# EAGLE board Envelope (EAGLE 9.6.2)
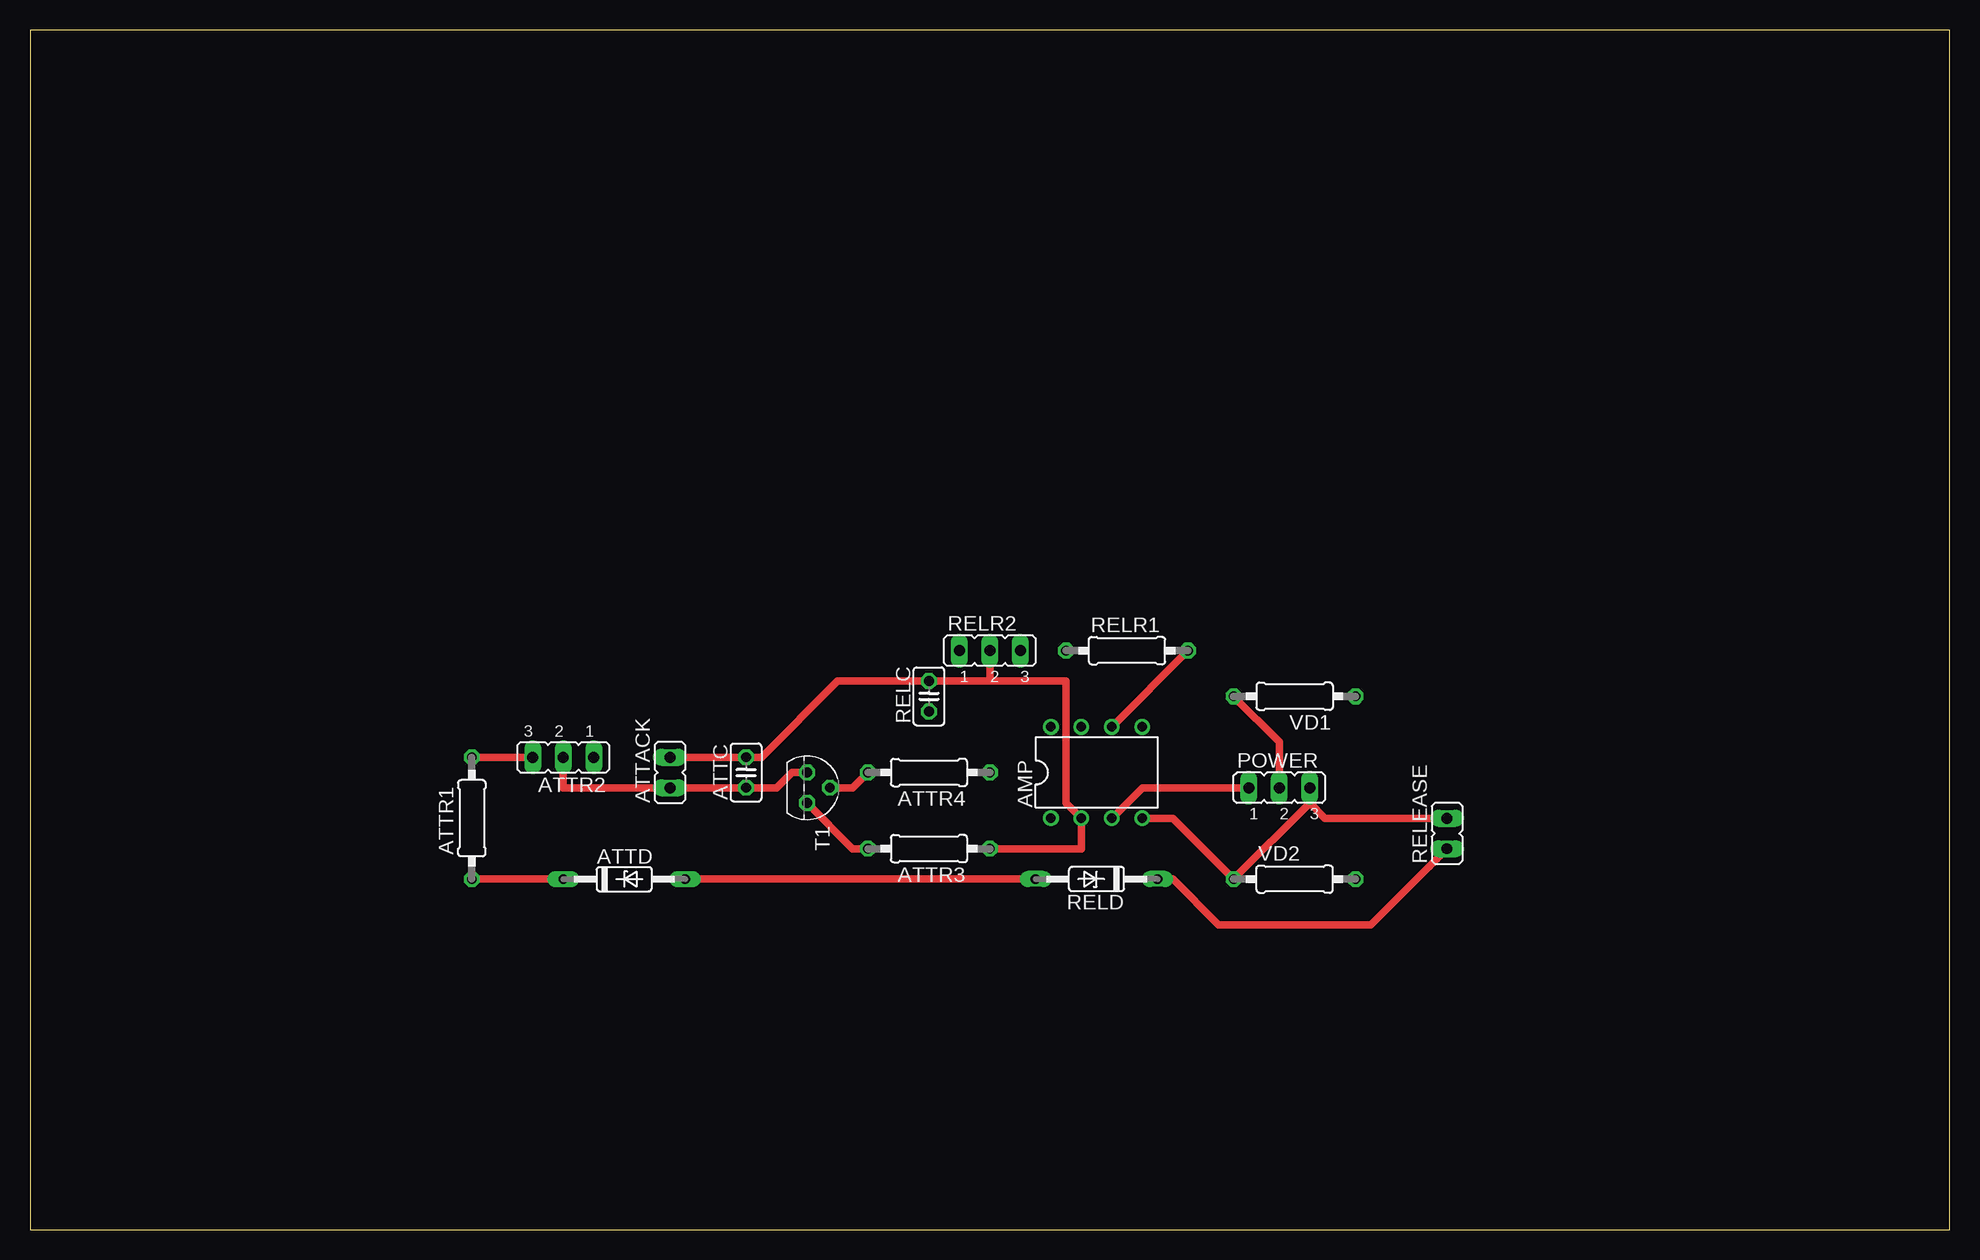
[diagram p0: board, top side]
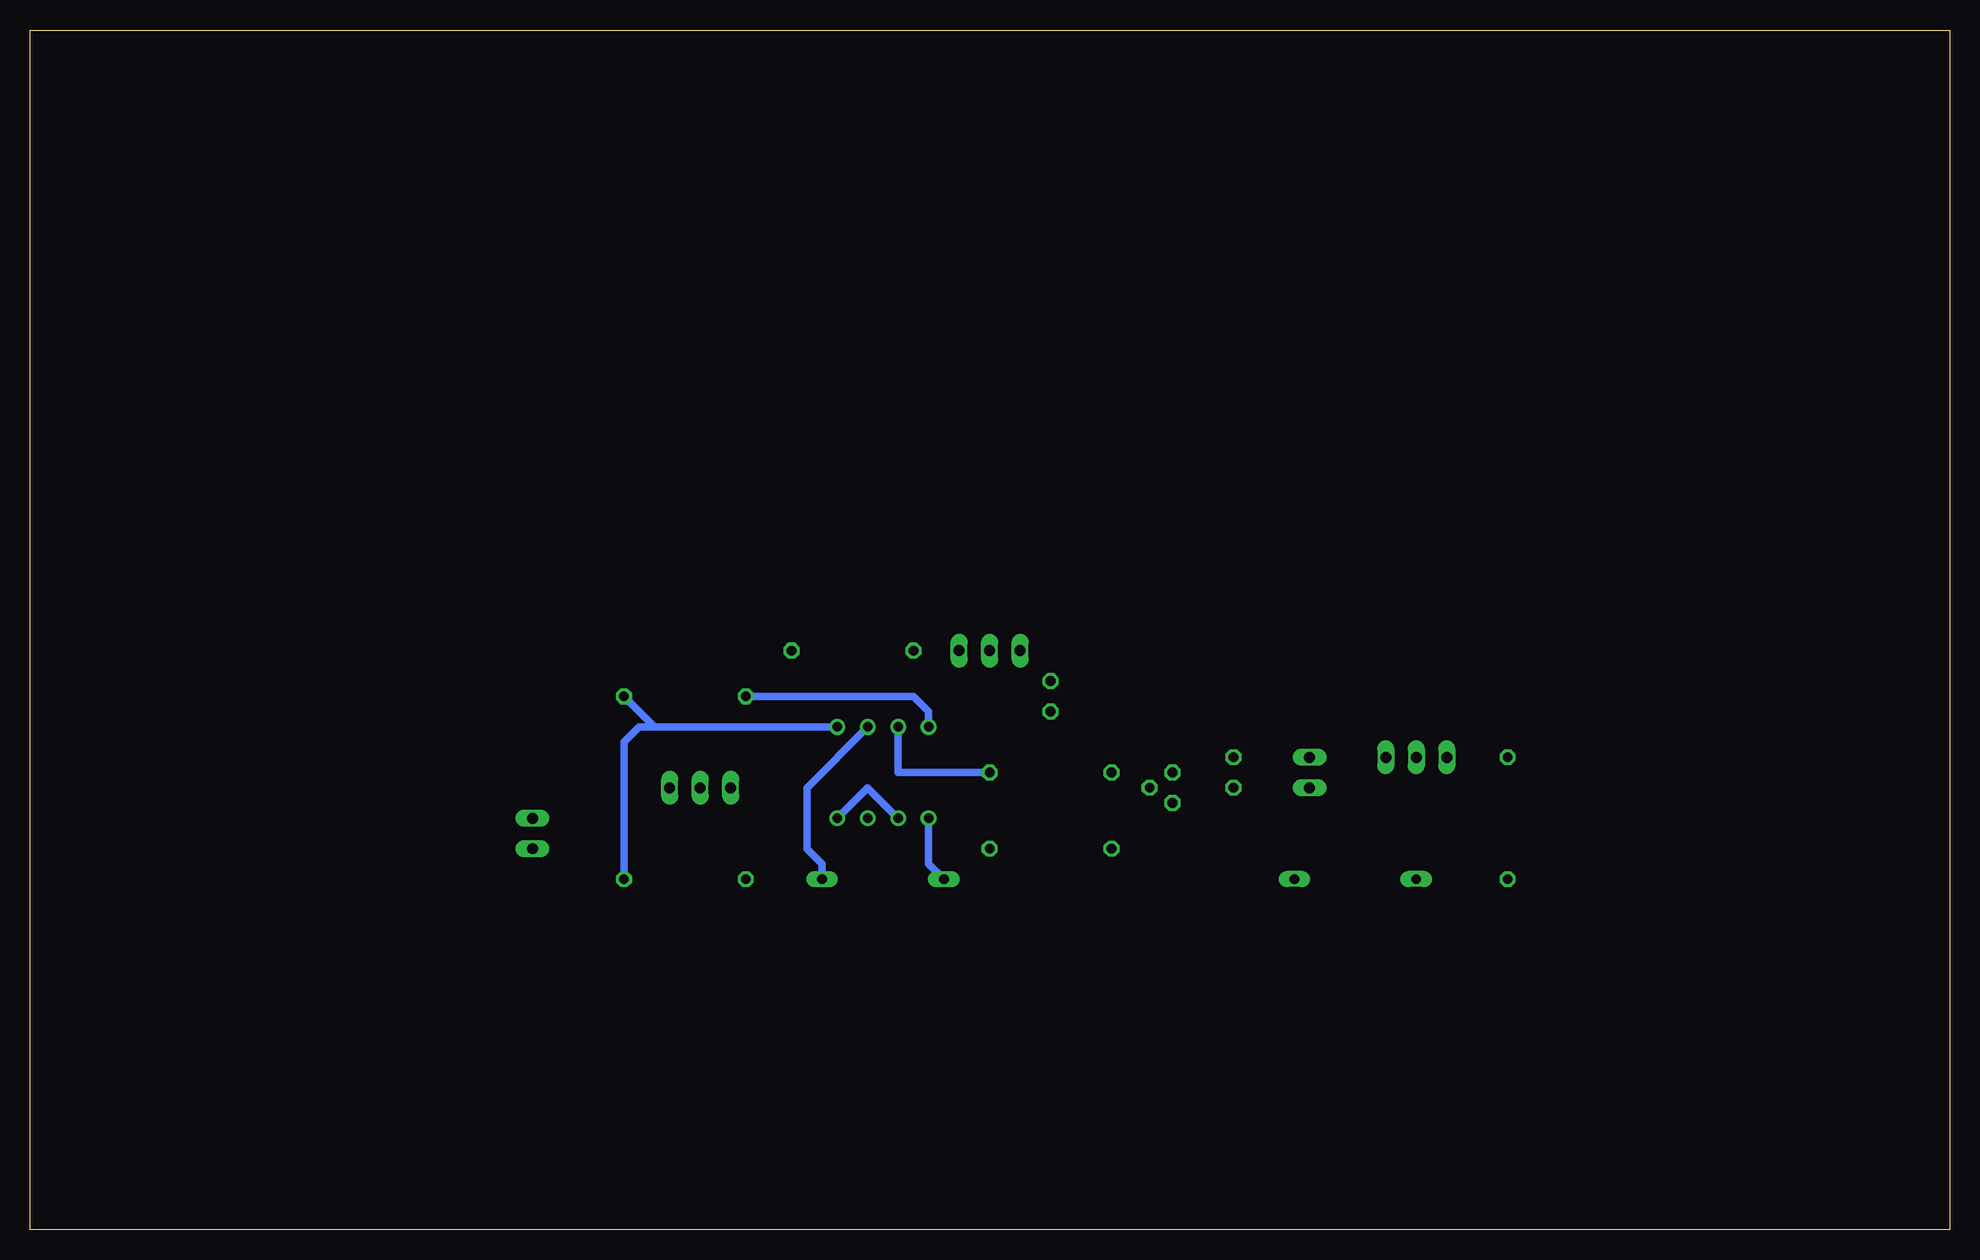
[diagram p1: board, bottom side, seen from below]

Size 160 x 100 mm. Coordinates in mm from the lower left corner, seen from the top.
Outline: 0,0 160,0 160,100 0,100 0,0
Copper layers (1*16): Top 0.035mm / dielectric 1.5mm / Bottom 0.035mm
Design rules "default": minimum track width 6mil, minimum drill 0.35mm, track to track 6mil, track to pad 6mil, pad to pad 6mil, via to via 6mil, smd to smd 6mil, copper to edge 40mil, drill to drill 6mil, minimum pad ring 10mil, minimum via ring 8mil, stop-mask expansion 4mil, vias tented up to drill 0mil, thermal gap 10mil

## Footprints (pad centres in the part's own frame; a part is rotated, then mirrored left to right if it is on the bottom)
DIL08 = drill 0.813 pad 1.27: 1 -3.81,-3.81; 2 -1.27,-3.81; 3 1.27,-3.81; 4 3.81,-3.81; 5 3.81,3.81; 6 1.27,3.81; 7 -1.27,3.81; 8 -3.81,3.81
JP1 = drill 0.914 long: 1 0,-1.27; 2 0,1.27
C025-025X050 = drill 0.813 octagon: 1 -1.27,0; 2 1.27,0
DO35Z10 = drill 0.813 long: A 5.08,0; C -5.08,0
0207/10 = drill 0.813 octagon: 1 -5.08,0; 2 5.08,0
JP2 = drill 0.914 long: 1 -2.54,0; 2 0,0; 3 2.54,0
TO92 = drill 0.813 octagon: 1 1.27,0; 2 0,1.905; 3 -1.27,0

## Placement (x,y rotation side)
AMP  LM358N  [DIL08]  88.9,38.1 0 top
ATTACK  [JP1]  53.34,38.1 0 top
ATTC  [C025-025X050]  59.69,38.1 90 top
ATTD  1N821  [DO35Z10]  49.53,29.21 0 top
ATTR1  [0207/10]  36.83,34.29 90 top
ATTR2  [JP2]  44.45,39.37 180 top
ATTR3  [0207/10]  74.93,31.75 180 top
ATTR4  [0207/10]  74.93,38.1 180 top
POWER  [JP2]  104.14,36.83 0 top
RELC  [C025-025X050]  74.93,44.45 90 top
RELD  1N821  [DO35Z10]  88.9,29.21 180 top
RELEASE  [JP1]  118.11,33.02 0 top
RELR1  [0207/10]  91.44,48.26 0 top
RELR2  [JP2]  80.01,48.26 0 top
T1  BC547  [TO92]  64.77,36.83 270 top
VD1  [0207/10]  105.41,44.45 180 top
VD2  [0207/10]  105.41,29.21 0 top

## Library data of the parts
AMP = linear
ATTACK ATTR2 POWER RELEASE RELR2 = jumper
ATTC RELC = rcl; SPICEPREFIX: C
ATTD RELD = diode
ATTR1 ATTR3 ATTR4 RELR1 VD1 VD2 = rcl; SPICEPREFIX: R
T1 = transistor

## Nets
GND: AMP.2 AMP.4 ATTACK.2 ATTC.2 ATTR3.1 POWER.3 RELC.2 RELEASE.2 RELR2.2 VD2.1
N$1: AMP.5 VD1.1 VD2.2
N$2: AMP.7 ATTR4.1
N$3: ATTR4.2 T1.2
N$4: ATTR1.2 ATTR2.3
N$5: ATTR3.2 T1.1
N$6: ATTACK.1 ATTC.1 ATTR2.2 T1.3
N$7: ATTD.C ATTR1.1
N$8: AMP.1 ATTD.A RELD.A
N$9: AMP.8 POWER.2 VD1.2
N$10: AMP.3 POWER.1
N$11: AMP.6 RELD.C RELEASE.1 RELR1.2

## Tracks (layer width: path | path; a pad name or v marks a point on that pad's centre or on a via)
GND
  Top 0.61: ATTACK.2 ATTC.2 60.96,39.37 67.31,45.72 RELC.2 80.01,45.72 | RELR2.2 80.01,45.72 | 80.01,45.72 86.36,45.72 86.36,35.56 AMP.2 87.63,31.75 ATTR3.1 | RELEASE.2 107.95,34.29 106.68,35.56 | AMP.4 95.25,34.29 VD2.1 106.68,35.56 | POWER.3 106.68,35.56
  Bottom 0.61: AMP.2 90.17,36.83 AMP.4
N$1
  Bottom 0.61: VD1.1 107.95,41.91 | 107.95,41.91 AMP.5 | VD2.2 110.49,40.64 109.22,41.91 107.95,41.91
N$2
  Bottom 0.61: ATTR4.1 87.63,38.1 AMP.7
N$3
  Top 0.61: ATTR4.2 68.58,36.83 T1.2
N$4
  Top 0.61: ATTR1.2 ATTR2.3
N$5
  Top 0.61: ATTR3.2 68.58,31.75 T1.1
N$6
  Top 0.61: ATTR2.2 44.45,36.83 ATTACK.1 | 54.61,36.83 ATTACK.1 | ATTACK.1 ATTC.1 62.23,36.83 63.5,38.1 T1.3
N$7
  Top 0.61: ATTR1.1 ATTD.C
N$8
  Top 0.61: RELD.A ATTD.A
  Bottom 0.61: AMP.1 85.09,30.48 RELD.A
N$9
  Top 0.61: VD1.2 104.14,40.64 POWER.2
  Bottom 0.61: AMP.8 85.09,43.18 86.36,44.45 VD1.2
N$10
  Top 0.61: AMP.3 92.71,36.83 POWER.1
N$11
  Top 0.61: RELD.C 95.25,29.21 99.06,25.4 111.76,25.4 RELEASE.1 | 93.98,45.72 RELR1.2 AMP.6
  Bottom 0.61: RELD.C 93.98,30.48 95.25,31.75 95.25,36.83 AMP.6